# EAGLE board LOCO-Light (EAGLE 9.5.2)
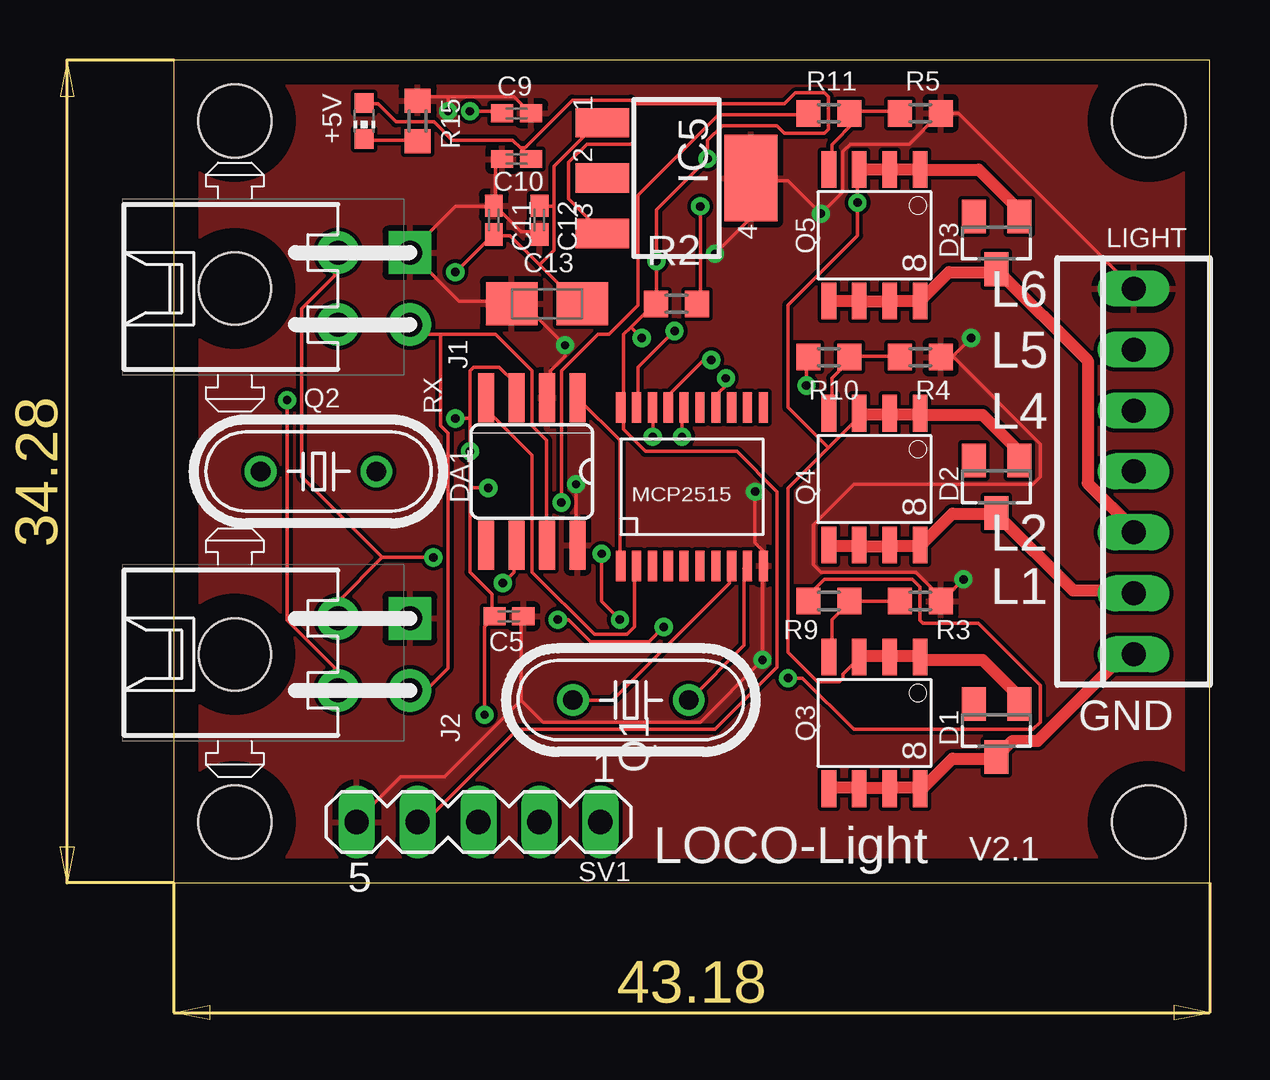
[diagram p0: board, top side]
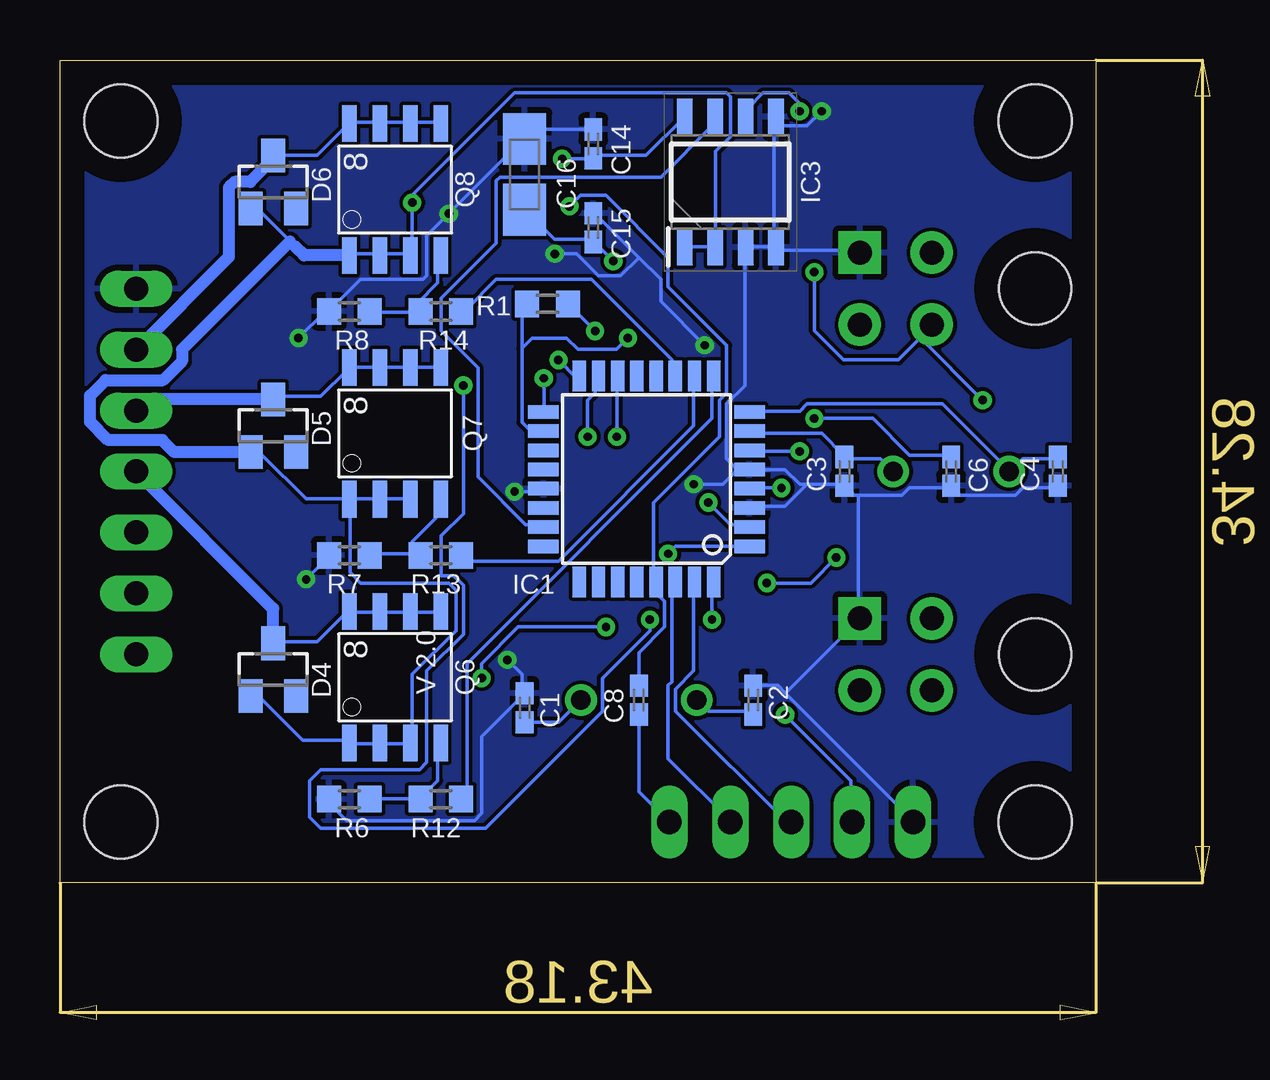
[diagram p1: board, bottom side, seen from below]

Size 43.18 x 34.29 mm. Coordinates in mm from the lower left corner, seen from the top.
Outline: 0,0 43.18,0 43.18,34.29 0,34.29 0,0
Copper layers (1*16): Top 0.035mm / dielectric 1.5mm / Bottom 0.035mm
Design rules "default": minimum track width 6mil, minimum drill 0.35mm, track to track 6mil, track to pad 6mil, pad to pad 6mil, via to via 6mil, smd to smd 6mil, copper to edge 40mil, drill to drill 6mil, minimum pad ring 10mil, minimum via ring 8mil, stop-mask expansion 4mil, vias tented up to drill 0mil, thermal gap 10mil
Holes 3.05 mm at 40.64,2.54 40.64,31.75 2.54,2.54 2.54,31.75

## Footprints (pad centres in the part's own frame; a part is rotated, then mirrored left to right if it is on the bottom)
CHIP-LED0603 = smd 0.8 x 0.8: A 0,-0.75; C 0,0.75
C0402K = smd 0.925 x 0.74: 1 -0.6,0; 2 0.6,0
A/3216-18W = smd 2.15 x 1.8: + 1.475,0; - -1.475,0
SOT23 = smd 1 x 1.4: 1 -0.95,-1.1; 2 0.95,-1.1; 3 0,1.1
SO08 = smd 0.66 x 2.032: 1 -1.905,-3.073; 2 -0.635,-3.073; 3 0.635,-3.073; 4 1.905,-3.073; 5 1.905,3.073; 6 0.635,3.073; 7 -0.635,3.073; 8 -1.905,3.073
TQFP32-08 = smd 1.27 x 0.559: 1 -4.293,2.8; 2 -4.293,2; 3 -4.293,1.2; 4 -4.293,0.4; 5 -4.293,-0.4; 6 -4.293,-1.2; 7 -4.293,-2; 8 -4.293,-2.8; 17 4.293,-2.8; 18 4.293,-2; 19 4.293,-1.2; 20 4.293,-0.4; 21 4.293,0.4; 22 4.293,1.2; 23 4.293,2; 24 4.293,2.8 | smd 0.559 x 1.27: 9 -2.8,-4.293; 10 -2,-4.293; 11 -1.2,-4.293; 12 -0.4,-4.293; 13 0.4,-4.293; 14 1.2,-4.293; 15 2,-4.293; 16 2.8,-4.293; 25 2.8,4.293; 26 2,4.293; 27 1.2,4.293; 28 0.4,4.293; 29 -0.4,4.293; 30 -1.2,4.293; 31 -2,4.293; 32 -2.8,4.293
TSSOP20 = smd 1.27 x 0.381: 1 -3.302,2.642; 2 -3.302,1.981; 3 -3.302,1.321; 4 -3.302,0.66; 5 -3.302,0; 6 -3.302,-0.66; 7 -3.302,-1.321; 8 -3.302,-1.981; 9 -3.302,-2.642; 10 -3.302,-3.302; 11 3.302,-3.302; 12 3.302,-2.642; 13 3.302,-1.981; 14 3.302,-1.321; 15 3.302,-0.66; 16 3.302,0; 17 3.302,0.66; 18 3.302,1.321; 19 3.302,1.981; 20 3.302,2.642
SOIC127P600X175-8N = smd 1.525 x 0.65: 1 -2.712,1.905; 2 -2.712,0.635; 3 -2.712,-0.635; 4 -2.712,-1.905; 5 2.712,-1.905; 6 2.712,-0.635; 7 2.712,0.635; 8 2.712,1.905
SOT223 = smd 1.219 x 2.235: 1 -2.311,-3.099; 2 0,-3.099; 3 2.311,-3.099 | smd 3.6 x 2.2: 4 0,3.099
SHDRRA4W102P300_2X2_686X892X73 = drill 1 pad 1.778 square: 1 1.5,-7.3 | drill 1 pad 1.778: 2 1.5,-4.3; 3 -1.5,-7.3; 4 -1.5,-4.3 | hole 3: 0,0
22-23-2071 = drill 1 long: 1 -7.62,0; 2 -5.08,0; 3 -2.54,0; 4 0,0; 5 2.54,0; 6 5.08,0; 7 7.62,0
HC49/S = drill 0.813: 1 -2.413,0; 2 2.413,0
SO-8 = smd 1.524 x 0.61: 1 -2.743,1.905; 2 -2.743,0.635; 3 -2.743,-0.635; 4 -2.743,-1.905; 5 2.743,-1.905; 6 2.743,-0.635; 7 2.743,0.635; 8 2.743,1.905
R0603 = smd 1 x 1.1: 1 -0.85,0; 2 0.85,0
MA05-1 = drill 1.016 long: 1 -5.08,0; 2 -2.54,0; 3 0,0; 4 2.54,0; 5 5.08,0

## Placement (x,y rotation side)
+5V  [CHIP-LED0603]  7.94,31.75 180 top
C1  22p  [C0402K]  23.81,7.3 90 bottom
C2  22p  [C0402K]  14.29,7.62 90 bottom
C3  22p  [C0402K]  10.48,17.14 270 bottom
C4  22p  [C0402K]  1.59,17.14 270 bottom
C5  100n  [C0402K]  13.97,11.11 180 top
C6  100n  [C0402K]  6.03,17.14 270 bottom
C8  100n  [C0402K]  19.05,7.62 90 bottom
C9  1n  [C0402K]  14.29,32.07 180 top
C10  100n  [C0402K]  14.29,30.16 0 top
C11  100n  [C0402K]  13.34,27.62 270 top
C12  1n  [C0402K]  15.24,27.62 90 top
C13  16uF  [A/3216-18W]  15.56,24.13 0 top
C14  1n  [C0402K]  20.95,30.8 270 bottom
C15  100n  [C0402K]  20.95,27.3 270 bottom
C16  16uF  [A/3216-18W]  23.81,29.53 270 bottom
D1  BAS40  [SOT23]  34.29,6.35 180 top
D2  BAS40  [SOT23]  34.29,16.51 180 top
D3  BAS40  [SOT23]  34.29,26.67 180 top
D4  BAS40  [SOT23]  34.29,8.89 0 bottom
D5  BAS40  [SOT23]  34.29,19.05 0 bottom
D6  BAS40  [SOT23]  34.29,29.21 0 bottom
DA1  TJA1050  [SO08]  14.92,17.14 180 top
IC1  Atmega 328-P  [TQFP32-08]  18.73,16.83 180 bottom
IC2  MCP2515  [TSSOP20]  21.27,16.51 90 top
IC3  ACS712ELCTR-20A-T  [SOIC127P600X175-8N]  15.24,29.21 90 bottom
IC5  LM340MP-05  [SOT223]  20.95,29.37 270 top
J1  3-794618-4  [SHDRRA4W102P300_2X2_686X892X73]  2.54,24.77 90 top
J2  3-794618-4  [SHDRRA4W102P300_2X2_686X892X73]  2.54,9.53 90 top
LIGHT  22-23-2071  [22-23-2071]  40.01,17.14 90 top
Q1  8MHz  [HC49/S]  19.05,7.62 180 top
Q2  16MHz  [HC49/S]  6.03,17.14 180 top
Q3  FDS5680  [SO-8]  29.21,6.67 270 top
Q4  FDS5680  [SO-8]  29.21,16.83 270 top
Q5  FDS5680  [SO-8]  29.21,26.99 270 top
Q6  FDS5680  [SO-8]  29.21,8.57 90 bottom
Q7  FDS5680  [SO-8]  29.21,18.73 90 bottom
Q8  FDS5680  [SO-8]  29.21,28.89 90 bottom
R1  10k  [R0603]  22.86,24.13 180 bottom
R2  10k  [R0603]  20.95,24.13 180 top
R3  10k  [R0603]  31.11,11.75 180 top
R4  10k  [R0603]  31.11,21.91 180 top
R5  10k  [R0603]  31.11,32.07 180 top
R6  10k  [R0603]  31.11,3.49 0 bottom
R7  10k  [R0603]  31.11,13.65 0 bottom
R8  10k  [R0603]  31.11,23.81 0 bottom
R9  10k  [R0603]  27.3,11.75 180 top
R10  10k  [R0603]  27.3,21.91 180 top
R11  10k  [R0603]  27.3,32.07 180 top
R12  10k  [R0603]  27.3,3.49 0 bottom
R13  10k  [R0603]  27.3,13.65 0 bottom
R14  10k  [R0603]  27.3,23.81 0 bottom
R15  10k  [R0603]  10.16,31.75 270 top
SV1  [MA05-1]  12.7,2.54 180 top

## Library data of the parts
+5V = led
C1-C6 C8-C16 = rcl; SPICEPREFIX: C
D1-D6 = diode
DA1 = TJA1050
IC1 = atmel; MPN: ATMEGA8-16AU; OC_FARNELL: 9171371; OC_NEWARK: 73M8863
IC2 = mcp2514
IC3 = SamacSys_Parts; ALLIED_NUMBER: R1076682; DESCRIPTION: ACS712ELCTR-20A-T, Hall Effect Sensor 5V 8-Pin SOIC, SOIC N; HEIGHT: 1.75mm; MANUFACTURER_NAME: Allegro Microsystems; MANUFACTURER_PART_NUMBER: ACS712ELCTR-20A-T; RS_PART_NUMBER: 6807135P; RS_PRICE-STOCK: http://uk.rs-online.com/web/p/products/6807135P
IC5 = linear
J1 J2 = SamacSys_Parts; DESCRIPTION: 4 way 2 row r/a header Mate-N-Lok; HEIGHT: 7.37mm; MANUFACTURER_NAME: TE Connectivity; MANUFACTURER_PART_NUMBER: 3-794618-4
LIGHT = con-molex; MF: MOLEX; MPN: 22-23-2071; OC_FARNELL: 1654534; OC_NEWARK: 56H0445
Q1 Q2 = crystal; OC_FARNELL: 1667008; OC_NEWARK: unknown
Q3-Q8 = transistor-fet
R1-R15 = rcl; SPICEPREFIX: R
SV1 = con-lstb; OC_FARNELL: unknown; OC_NEWARK: unknown

## Nets
+12V: C11.2 C12.2 C13.+ IC5.1 J1.4 J2.4
A0: IC1.23 IC3.7
A1: IC1.24
A2: IC1.25
A3: IC1.26
A4: IC1.27
A5: IC1.28
CAN-H: DA1.7 J1.3 J2.3
CAN-L: DA1.6 J1.2 J2.2
CAN-OCC1: C1.1 IC2.9 Q1.1
CAN-OCC2: C2.1 IC2.8 Q1.2
CS: IC1.14 IC2.18
D2: IC1.32 R9.2
D3: IC1.1 R10.2
D4: IC1.2 R11.2
D5: IC1.9 R12.2
D6: IC1.10 R13.2
D7: IC1.11 R14.2
D8: IC1.12
D9: IC1.13
DTR: C8.1 SV1.1
GND: C1.2 C2.2 C3.2 C4.2 C5.1 C6.2 C9.1 C10.1 C11.1 C12.1 C13.- C14.1 C15.1 C16.- DA1.2 DA1.8 IC1.3 IC1.5 IC1.21 IC2.10 IC3.3 IC3.4 IC3.5 IC5.4 J1.1 J2.1 LIGHT.7 R3.1 R4.1 R5.1 R6.1 R7.1 R8.1 R15.1 SV1.5
L1: D1.3 LIGHT.1 Q3.5 Q3.6 Q3.7 Q3.8
L2: D2.3 LIGHT.2 Q4.5 Q4.6 Q4.7 Q4.8
L3: D3.3 LIGHT.3 Q5.5 Q5.6 Q5.7 Q5.8
L4: D4.3 LIGHT.4 Q6.5 Q6.6 Q6.7 Q6.8
L5: D5.3 LIGHT.5 Q7.5 Q7.6 Q7.7 Q7.8
L6: D6.3 LIGHT.6 Q8.5 Q8.6 Q8.7 Q8.8
LIGHT-GND: D1.1 D2.1 D3.1 D4.1 D5.1 D6.1 IC3.1 IC3.2 Q3.1 Q3.2 Q3.3 Q4.1 Q4.2 Q4.3 Q5.1 Q5.2 Q5.3 Q6.1 Q6.2 Q6.3 Q7.1 Q7.2 Q7.3 Q8.1 Q8.2 Q8.3
N$1: C9.2 IC3.6
N$2: Q3.4 R3.2 R9.1
N$3: Q4.4 R4.2 R10.1
N$4: Q5.4 R5.2 R11.1
N$5: Q6.4 R6.2 R12.1
N$6: IC2.19 R1.1
N$7: Q7.4 R7.2 R13.1
N$8: Q8.4 R8.2 R14.1
N$10: C3.1 IC1.7 Q2.1
N$11: C4.1 IC1.8 Q2.2
N$12: +5V.C R15.2
N$15: C8.2 IC1.29 R2.1
RX: IC1.31 SV1.3
RXCAN: DA1.4 IC2.2
SCK: IC1.17 IC2.14
SI: IC1.16 IC2.17
SO: IC1.15 IC2.16
TX: IC1.30 SV1.2
TXCAN: DA1.1 IC2.1
VCC: +5V.A C5.2 C6.1 C10.2 C14.2 C15.2 C16.+ DA1.3 IC1.4 IC1.6 IC1.18 IC2.20 IC3.8 IC5.3 R1.2 R2.2 SV1.4

## Tracks (layer width: path | path; a pad name or v marks a point on that pad's centre or on a via)
+12V  (via drill 0.35)
  Top 0.152: 15.85,28.19 15.24,28.19 C12.2 | 15.24,25.76 16.92,24.08 C13.+ | 15.24,25.76 14.02,26.98 13.41,26.98 C11.2 13.26,26.98 v11.73,25.45 | 15.85,28.19 15.85,26.36 15.24,25.76 | v4.72,20.12 4.72,10.95 6.71,8.97 6.71,8.16 J2.4 | 15.85,28.19 15.85,29.87 17.53,31.55 17.83,31.55 IC5.1
  Bottom 0.152: v11.73,25.45 11.73,23.01 10.52,21.79 8.23,21.79 7.32,22.71 | 7.32,22.71 6.86,23.16 J1.4 7.32,22.71 | 7.32,22.71 v4.72,20.12
A0
  Bottom 0.152: IC1.23 23.16,14.94 23.77,14.94 25.76,16.92 25.76,21.48 27.29,23.01 27.29,24.36 24.99,26.66 24.99,29.26 24.84,29.41 18.14,29.41 16,31.55 16,31.85 IC3.7
CAN-H
  Top 0.152: 11.12,22.86 10.21,22.86 9.91,23.16 J1.3 | 11.12,22.86 13.41,22.86 14.94,21.34 14.94,19.05 15.54,18.44 15.54,14.17 DA1.7 | J2.3 10.51,8.03 11.43,8.94 11.43,18.75 11.12,19.05 11.12,22.86
CAN-L  (via drill 0.35)
  Top 0.152: v13.72,12.5 14.17,12.95 14.17,14.02 DA1.6 | 8.69,13.56 v10.82,13.56 | 8.69,13.56 6.87,11.74 J2.2 | 8.69,13.56 5.33,16.92 5.33,23.93 6.71,25.3 6.71,26.21 J1.2
  Bottom 0.152: v13.72,12.5 11.89,12.5 v10.82,13.56
CAN-OCC1
  Top 0.152: IC2.9 23.77,13.11 23.77,9.91 21.49,7.62 Q1.1
  Bottom 0.152: C1.1 23.77,6.71 22.4,6.71 21.49,7.62 Q1.1
CAN-OCC2
  Top 0.152: Q1.2 18.29,7.62 23.16,12.5 23.16,13.11 IC2.8
  Bottom 0.152: C2.1 14.33,7.16 16.15,7.16 16.61,7.62 Q1.2
CS  (via drill 0.35)
  Top 0.152: v19.96,18.59 19.96,19.81 IC2.18
  Bottom 0.152: v19.96,18.59 19.96,21.03 IC1.14
D2  (via drill 0.35)
  Top 0.152: v16,10.97 16.46,10.97 17.37,10.06 19.81,10.06 v20.42,10.67 | v25.6,8.53 26.21,8.53 28.35,6.4 35.81,6.4 36.12,6.71 36.12,8.23 33.53,10.82 31.22,10.82 31.1,10.94 31.1,12.34 30.79,12.65 27.13,12.65 26.36,11.89 R9.2
  Bottom 0.152: v16,10.97 16,12.5 IC1.32 | v20.42,10.67 24.08,10.67 25.6,9.14 v25.6,8.53
D3  (via drill 0.35)
  Top 0.152: v17.83,13.72 17.83,11.73 v18.59,10.97 | v26.36,20.73 26.36,21.79 R10.2
  Bottom 0.152: v17.83,13.72 17.53,14.02 14.48,14.02 IC1.1 | v18.59,10.97 18.59,10.52 20.57,8.53 20.57,7.16 25.45,2.29 32.31,2.29 32.77,2.74 32.77,4.27 32.31,4.72 28.19,4.72 27.89,5.03 27.89,8.84 26.36,10.36 26.36,12.39 26.77,12.79 27.29,12.79 27.29,14.46 26.36,15.39 v26.36,20.73
D4  (via drill 0.35)
  Top 0.152: v16.15,15.85 16.15,21.34 17.68,22.86 18.14,22.86 19.36,24.08 19.36,28.65 22.71,32 26.21,32 R11.2
  Bottom 0.152: v16.15,15.85 15.24,14.94 14.48,14.94 IC1.2
D5
  Bottom 0.152: IC1.9 16,21.03 16,19.36 26.21,9.14 26.21,3.5 R12.2
D6
  Bottom 0.152: IC1.10 16.76,21.03 16.76,19.05 22.4,13.41 26.06,13.41 26.21,13.56 R13.2
D7
  Bottom 0.152: IC1.11 17.68,21.18 17.68,21.79 21.03,25.15 24.99,25.15 26.21,23.93 R14.2
DTR
  Bottom 0.152: C8.1 19.05,3.81 SV1.1
GND  (via drill 0.35)
  Top 0.152: v33.24,22.71 32.47,21.94 | 32.31,22.1 32.16,21.95 R4.1 32.31,22.1 | v32.92,12.65 32.16,11.89 R3.1 32,11.89 30.94,12.95 26.98,12.95 26.67,13.26 26.67,14.94 28.35,16.61 35.81,16.61 36.12,16.92 36.12,18.29 32.47,21.94 | DA1.2 15.7,20.27 15.7,21.34 16.31,21.95 v16.31,22.4 14.63,24.08 14.17,24.08 C13.- 14.02,24.23 11.89,24.23 9.91,26.21 J1.1 9.91,26.36 11.73,28.19 13.26,28.19 C11.1 | 14.94,32.16 C9.1 14.78,32.16 14.17,32.77 11.43,32.77 | 11.43,32.77 10.21,32.77 R15.1 | C11.1 13.41,28.35 13.41,29.87 13.56,30.02 C10.1 | C12.1 15.24,27.13 14.48,27.13 13.41,28.19 C11.1 | v11.43,32.16 11.43,32.77 | v16.76,16.61 16.76,14.17 DA1.8 | 14.48,7.62 14.48,10.97 C5.1 | 14.48,7.62 11.28,4.42 9.45,4.42 7.62,2.59 SV1.5 | 14.48,7.62 15.39,6.71 21.95,6.71 v24.54,9.3 24.54,13.11 IC2.10 24.54,13.26 24.54,13.87 24.23,14.17 v24.23,16.31 | 32.31,22.1 32.47,21.94 | LIGHT.7 32.7,32.07 R5.1 32,32 31.87,32 30.65,30.79 28.19,30.79 27.89,30.48 27.89,28.8 v26.98,27.89 25.6,29.26 24.08,29.26 IC5.4 23.93,29.26 23.93,27.58 v22.55,26.21
  Bottom 0.152: v33.24,22.71 33.22,22.71 32.16,23.77 R8.1 32,23.93 31.87,23.93 30.65,25.15 28.04,25.15 27.89,25.3 27.89,26.98 v26.98,27.89 23.93,30.94 C16.- 23.77,31.09 23.47,31.39 21.03,31.39 C14.1 20.88,31.55 | v32.92,12.65 32,13.56 R7.1 | 19.05,26.06 18.14,25.15 18.14,24.23 v16.31,22.4 | 19.05,26.06 20.88,27.89 C15.1 | 13.41,26.52 14.48,26.52 IC3.3 14.63,26.36 14.63,20.73 15.39,19.96 15.39,17.68 14.94,17.22 | 13.41,26.52 13.41,31.55 | 13.41,31.55 13.41,31.85 IC3.5 13.41,31.55 | 13.41,26.52 IC3.4 13.26,26.36 9.91,26.36 J1.1 | v11.43,32.16 12.04,31.55 13.41,31.55 | 12.94,7.91 9.84,11.01 J2.1 9.91,11.73 9.91,16.15 | C2.2 14.17,8.23 13.26,8.23 12.94,7.91 | C4.2 1.68,16.46 3.05,16.46 3.35,16.15 5.64,16.15 5.94,16.46 C6.2 6.1,16.46 7.77,16.46 8.08,16.15 9.91,16.15 | 12.04,16.61 12.34,16.61 12.95,17.22 14.33,17.22 IC1.5 | 12.04,16.61 10.52,16.61 C3.2 10.36,16.46 10.06,16.15 9.91,16.15 | 12.04,16.61 12.95,15.7 14.33,15.7 IC1.3 | v16.76,16.61 15.54,16.61 14.94,17.22 | 14.94,17.22 14.48,17.22 IC1.5 | R6.1 32,3.35 31.24,2.59 25.91,2.59 25.6,2.9 25.6,6.1 23.93,7.77 C1.2 23.93,7.92 23.93,8.69 v24.54,9.3 | 12.94,7.91 7.62,2.59 SV1.5 | 14.94,17.22 IC1.5 | IC1.21 23.15,16.31 v24.23,16.31 | v22.55,26.21 21.64,26.21 20.73,25.3 19.81,25.3 19.05,26.06
  pour Top: 0,34.29 43.18,34.29 43.18,0 0,0
  pour Bottom: 0,34.29 43.18,34.29 43.18,0 0,0
L1
  Top 0.152: 27.43,3.96 Q3.5 | 28.5,3.96 Q3.6 28.65,3.96 | 29.72,3.96 Q3.7 29.87,3.96 | 34.29,5.18 D1.3 | 31.24,3.96 Q3.8 31.09,3.96
  Top 0.508: 28.5,3.96 27.43,3.96 | 28.65,3.96 29.72,3.96 | 34.29,5.18 32.46,5.18 31.24,3.96 | 31.09,3.96 29.87,3.96 | D1.3 34.96,5.92 36.01,5.92 39.62,9.53 LIGHT.1
L2
  Top 0.152: 27.43,14.02 Q4.5 | 28.5,14.02 Q4.6 28.65,14.02 | 29.72,14.02 Q4.7 29.87,14.02 | 31.24,14.17 Q4.8 31.09,14.02 | 34.29,15.39 D2.3
  Top 0.508: 28.5,14.02 27.43,14.02 | 28.65,14.02 29.72,14.02 | 31.24,14.17 32.46,15.39 34.29,15.39 37.49,12.19 39.93,12.19 LIGHT.2 | 31.09,14.02 29.87,14.02
L3
  Top 0.152: 27.43,24.23 Q5.5 | 28.5,24.23 Q5.6 28.65,24.23 | 29.72,24.23 Q5.7 29.87,24.23 | 31.24,24.38 Q5.8 31.09,24.23 | 34.29,25.45 D3.3
  Top 0.508: 28.5,24.23 27.43,24.23 | 28.65,24.23 29.72,24.23 | 34.29,25.45 32.31,25.45 31.24,24.38 | 31.09,24.23 29.87,24.23 | D3.3 38.09,21.77 38.09,16.66 40.01,14.75 LIGHT.3
L4
  Bottom 0.152: Q6.5 27.43,11.28 28.5,11.28 Q6.6 28.65,11.28 29.72,11.28 Q6.7 29.87,11.28 31.09,11.28 Q6.8 31.24,11.28 32.46,10.06 34.29,10.06 D4.3
  Bottom 0.508: LIGHT.4 34.29,11.43 34.29,10.06
L5
  Bottom 0.152: Q7.5 27.43,21.49 28.5,21.49 Q7.6 28.65,21.49 29.72,21.49 Q7.7 29.87,21.49 31.09,21.49 Q7.8 31.24,21.34 32.31,20.27 34.29,20.27 D5.3
  Bottom 0.508: D5.3 39.54,20.15 LIGHT.5
L6
  Bottom 0.152: Q8.5 27.43,31.7 28.5,31.7 Q8.6 28.65,31.7 29.72,31.7 Q8.7 29.87,31.7 31.09,31.7 Q8.8 31.24,31.55 32.46,30.33 34.29,30.33 D6.3 34.29,30.18
  Bottom 0.508: LIGHT.6 36.15,26.08 36.15,28.98 35.91,29.22 35.25,29.22 34.29,30.18
LIGHT-GND  (via drill 0.35)
  Top 0.152: 28.65,29.72 Q5.3 28.5,29.72 v28.5,28.35 28.5,26.98 25.6,24.07 25.6,19.82 27.28,18.14 | 29.72,29.72 Q5.2 29.87,29.72 | 31.24,29.72 Q5.1 31.09,29.72 | 28.65,9.45 Q3.3 28.5,9.3 27.89,8.69 27.89,8.53 27.74,8.38 26.82,8.38 25.6,9.61 25.6,16.45 27.28,18.14 | 29.72,9.45 Q3.2 29.87,9.45 | 31.24,9.3 Q3.1 31.09,9.45 | 29.72,19.51 Q4.2 29.87,19.51 | 31.24,19.51 Q4.1 31.09,19.51 | 27.28,18.14 28.65,19.51 Q4.3
  Top 0.508: 29.72,29.72 28.65,29.72 | D3.1 35.24,28.03 33.55,29.72 31.24,29.72 | 31.09,29.72 29.87,29.72 | 29.72,9.45 28.65,9.45 | D1.1 35.24,7.76 33.71,9.3 31.24,9.3 | 31.09,9.45 29.87,9.45 | 29.72,19.51 28.65,19.51 | D2.1 35.24,17.97 33.71,19.51 31.24,19.51 | 31.09,19.51 29.87,19.51
  Bottom 0.152: D4.1 35.2,7.77 34.9,7.77 33.07,5.94 31.24,5.94 Q6.1 31.09,5.79 29.87,5.79 Q6.2 29.72,5.79 28.65,5.79 Q6.3 28.5,5.94 28.5,8.69 26.67,10.52 26.67,12.19 26.97,12.49 30.64,12.49 31.09,12.94 31.09,15.85 Q7.1 | Q7.3 28.65,16 29.72,16 Q7.2 29.87,16 31.09,16 Q7.1 | D5.1 35.2,17.83 34.75,17.83 32.92,16 31.24,16 Q7.1 | IC3.1 17.07,26.52 16,26.52 IC3.2 15.85,26.52 15.85,30.48 15.24,31.09 15.24,32.77 15.39,32.92 24.23,32.92 28.5,28.65 v28.5,28.35 28.5,26.21 Q8.3 28.65,26.21 29.72,26.21 Q8.2 29.87,26.21 31.09,26.21 Q8.1 | 33.38,26.52 33.59,26.73 34.9,28.04 35.2,28.04 D6.1
  Bottom 0.508: Q8.1 33.01,26.15 33.38,26.52 | 33.59,26.73 38.09,22.23 38.09,21.74 38.88,20.95 41.27,20.95 41.92,20.3 41.92,19.21 41.16,18.45 38.91,18.45 38.41,17.95 D5.1
N$1  (via drill 0.35)
  Top 0.152: v12.34,32.16 13.56,32.16 C9.2
  Bottom 0.152: v12.34,32.16 12.34,32.46 12.8,32.92 13.87,32.92 14.48,32.31 14.48,32 IC3.6
N$2
  Top 0.152: R3.2 30.02,11.73 28.35,11.73 R9.1 28.19,11.73 27.43,10.97 27.43,9.45 Q3.4
N$3
  Top 0.152: R4.2 30.02,21.95 28.35,21.95 R10.1 28.19,21.79 27.43,21.03 27.43,19.66 Q4.4
N$4
  Top 0.152: R5.2 30.02,32.16 28.35,32.16 R11.1 28.38,31.71 27.43,30.77 27.43,29.87 Q5.4
N$5
  Bottom 0.152: R6.2 30.02,3.5 28.35,3.5 R12.1 28.19,3.5 27.43,4.27 27.43,5.79 Q6.4
N$6  (via drill 0.35)
  Top 0.152: v20.87,23 19.36,21.48 19.36,19.81 IC2.19
  Bottom 0.152: R1.1 v20.87,23
N$7
  Bottom 0.152: R7.2 30.02,13.72 28.35,13.72 R13.1 28.5,14.21 27.43,15.27 27.43,15.85 Q7.4
N$8
  Bottom 0.152: R8.2 30.02,23.77 28.35,23.77 R14.1 28.27,24.16 27.43,25.01 27.43,26.06 Q8.4
N$10
  Bottom 0.152: Q2.1 8.53,17.22 8.99,17.68 10.36,17.68 C3.1 10.52,17.83 11.43,18.75 14.33,18.75 IC1.7
N$11
  Bottom 0.152: C4.1 1.68,17.68 3.05,17.68 3.5,17.22 Q2.2 3.66,17.22 6.4,19.96 12.04,19.96 12.34,19.66 14.33,19.66 IC1.8
N$12
  Top 0.152: +5V.C 8.08,30.94 10.06,30.94 R15.2
N$15  (via drill 0.35)
  Top 0.152: v21.95,28.19 21.95,24.23 R2.1
  Bottom 0.152: C8.2 19.05,9.6 17.98,10.67 17.98,11.73 18.29,12.04 18.29,12.5 IC1.29 18.44,12.65 18.44,15.85 15.7,18.59 15.7,20.12 15.39,20.42 15.39,22.4 17.83,24.84 17.83,26.06 20.42,28.65 21.49,28.65 v21.95,28.19
RX
  Bottom 0.152: IC1.31 16.76,12.5 16.76,8.84 17.53,8.08 17.53,7.16 12.8,2.44 SV1.3
RXCAN
  Top 0.152: IC2.2 19.2,13.11 19.2,10.67 18.9,10.36 17.53,10.36 14.94,12.95 14.94,17.83 13.11,19.66 13.11,20.12 DA1.4
SCK  (via drill 0.35)
  Top 0.152: v23.01,21.03 23.01,20.73 22.71,20.42 22.71,19.81 IC2.14
  Bottom 0.152: v23.01,21.03 23.01,19.66 IC1.17
SI  (via drill 0.35)
  Top 0.152: v22.4,21.79 22.1,21.79 20.73,20.42 20.73,19.81 IC2.17
  Bottom 0.152: v22.4,21.79 21.64,21.03 IC1.16
SO  (via drill 0.35)
  Top 0.152: v21.18,18.59 21.18,19.81 IC2.16
  Bottom 0.152: v21.18,18.59 21.18,20.12 20.88,20.42 20.88,21.03 IC1.15
TX
  Bottom 0.152: IC1.30 17.68,12.5 17.68,8.38 17.83,8.23 17.83,5.18 15.24,2.59 SV1.2
TXCAN
  Top 0.152: IC2.1 18.59,13.26 18.59,18.44 16.92,20.12 DA1.1
VCC  (via drill 0.35)
  Top 0.152: 12.34,19.36 12.34,21.34 12.5,21.49 13.56,21.49 14.17,20.88 14.17,20.27 DA1.3 | 12.34,19.36 v12.34,17.98 12.34,16.46 | 12.34,16.46 12.34,12.95 13.26,12.04 13.26,11.12 C5.2 13.26,10.97 12.95,10.67 v12.95,7.01 | 12.34,19.36 v11.73,19.36 | 12.34,16.46 v13.11,16.46 | 18.75,19.81 18.75,22.86 19.05,23.16 | 19.05,23.16 19.96,24.08 R2.2 20.12,24.23 v20.12,25.91 20.12,28.04 v22.25,30.18 22.25,30.94 22.86,31.55 25.15,31.55 25.45,31.24 27.13,31.24 27.28,31.39 27.28,32.77 27.13,32.92 25.91,32.92 25.45,32.46 19.2,32.46 | 19.05,23.16 v19.51,22.71 | 14.46,30.62 14.91,30.18 14.94,30.18 C10.2 | 14.46,30.62 14.13,30.96 11.59,30.96 10.86,31.71 9.27,31.71 8.52,32.46 8.08,32.46 +5V.A | 18.75,19.81 18.75,18.9 19.66,17.98 23.47,17.98 25.15,16.31 25.15,8.99 22.55,6.4 14.33,6.4 10.52,2.59 10.21,2.59 SV1.4 | 18.75,19.81 IC2.20 | 19.2,32.46 19.2,30.94 19.05,30.79 17.22,30.79 16.46,30.02 16.46,28.5 17.83,27.13 IC5.3 | 19.2,32.46 19.05,32.61 16.61,32.61 14.63,30.63 14.48,30.63 14.46,30.62
  Bottom 0.152: v11.73,19.36 9.3,19.36 7.77,17.83 6.1,17.83 C6.1 | v13.11,16.46 14.33,16.46 IC1.4 | v12.34,17.98 14.33,17.98 IC1.6 | v12.95,7.01 10.21,4.27 10.21,2.59 SV1.4 | 23.93,22.27 23.93,24.08 R1.2 | 23.93,22.27 23.93,19.2 23.62,18.9 23.16,18.9 IC1.18 | C16.+ 23.77,28.04 22.55,26.82 21.03,26.82 C15.2 20.88,26.67 v20.12,25.91 | v19.51,22.71 19.98,22.23 21.6,22.23 22.07,22.7 23.5,22.7 23.93,22.27 | IC3.8 17.22,31.85 18.75,30.33 20.88,30.33 C14.2 21.03,30.18 v22.25,30.18

## Text on the board
tNames: L6 | L5 | RX | L4 | L2 | L1 | GND | LOCO-Light | V2.1
bNames: V 2.0